# Altium PCB JUNORPCFrontv3.PcbDoc (part 2 of 2)
Units mil, origin at the board's own origin, x right, y up, seen from the top; angles counter-clockwise.
Board outline 3967.04 x 3967.04 mil, 8 copper layers (Top Layer, Internal Plane 1, Signal Layer 1, Internal Plane 2, Signal Layer 2, Internal Plane 3, Internal Plane 4, Bottom Layer), stack 66.304 mil thick; 289 components, 182 nets, 1049 pads, 357 vias.
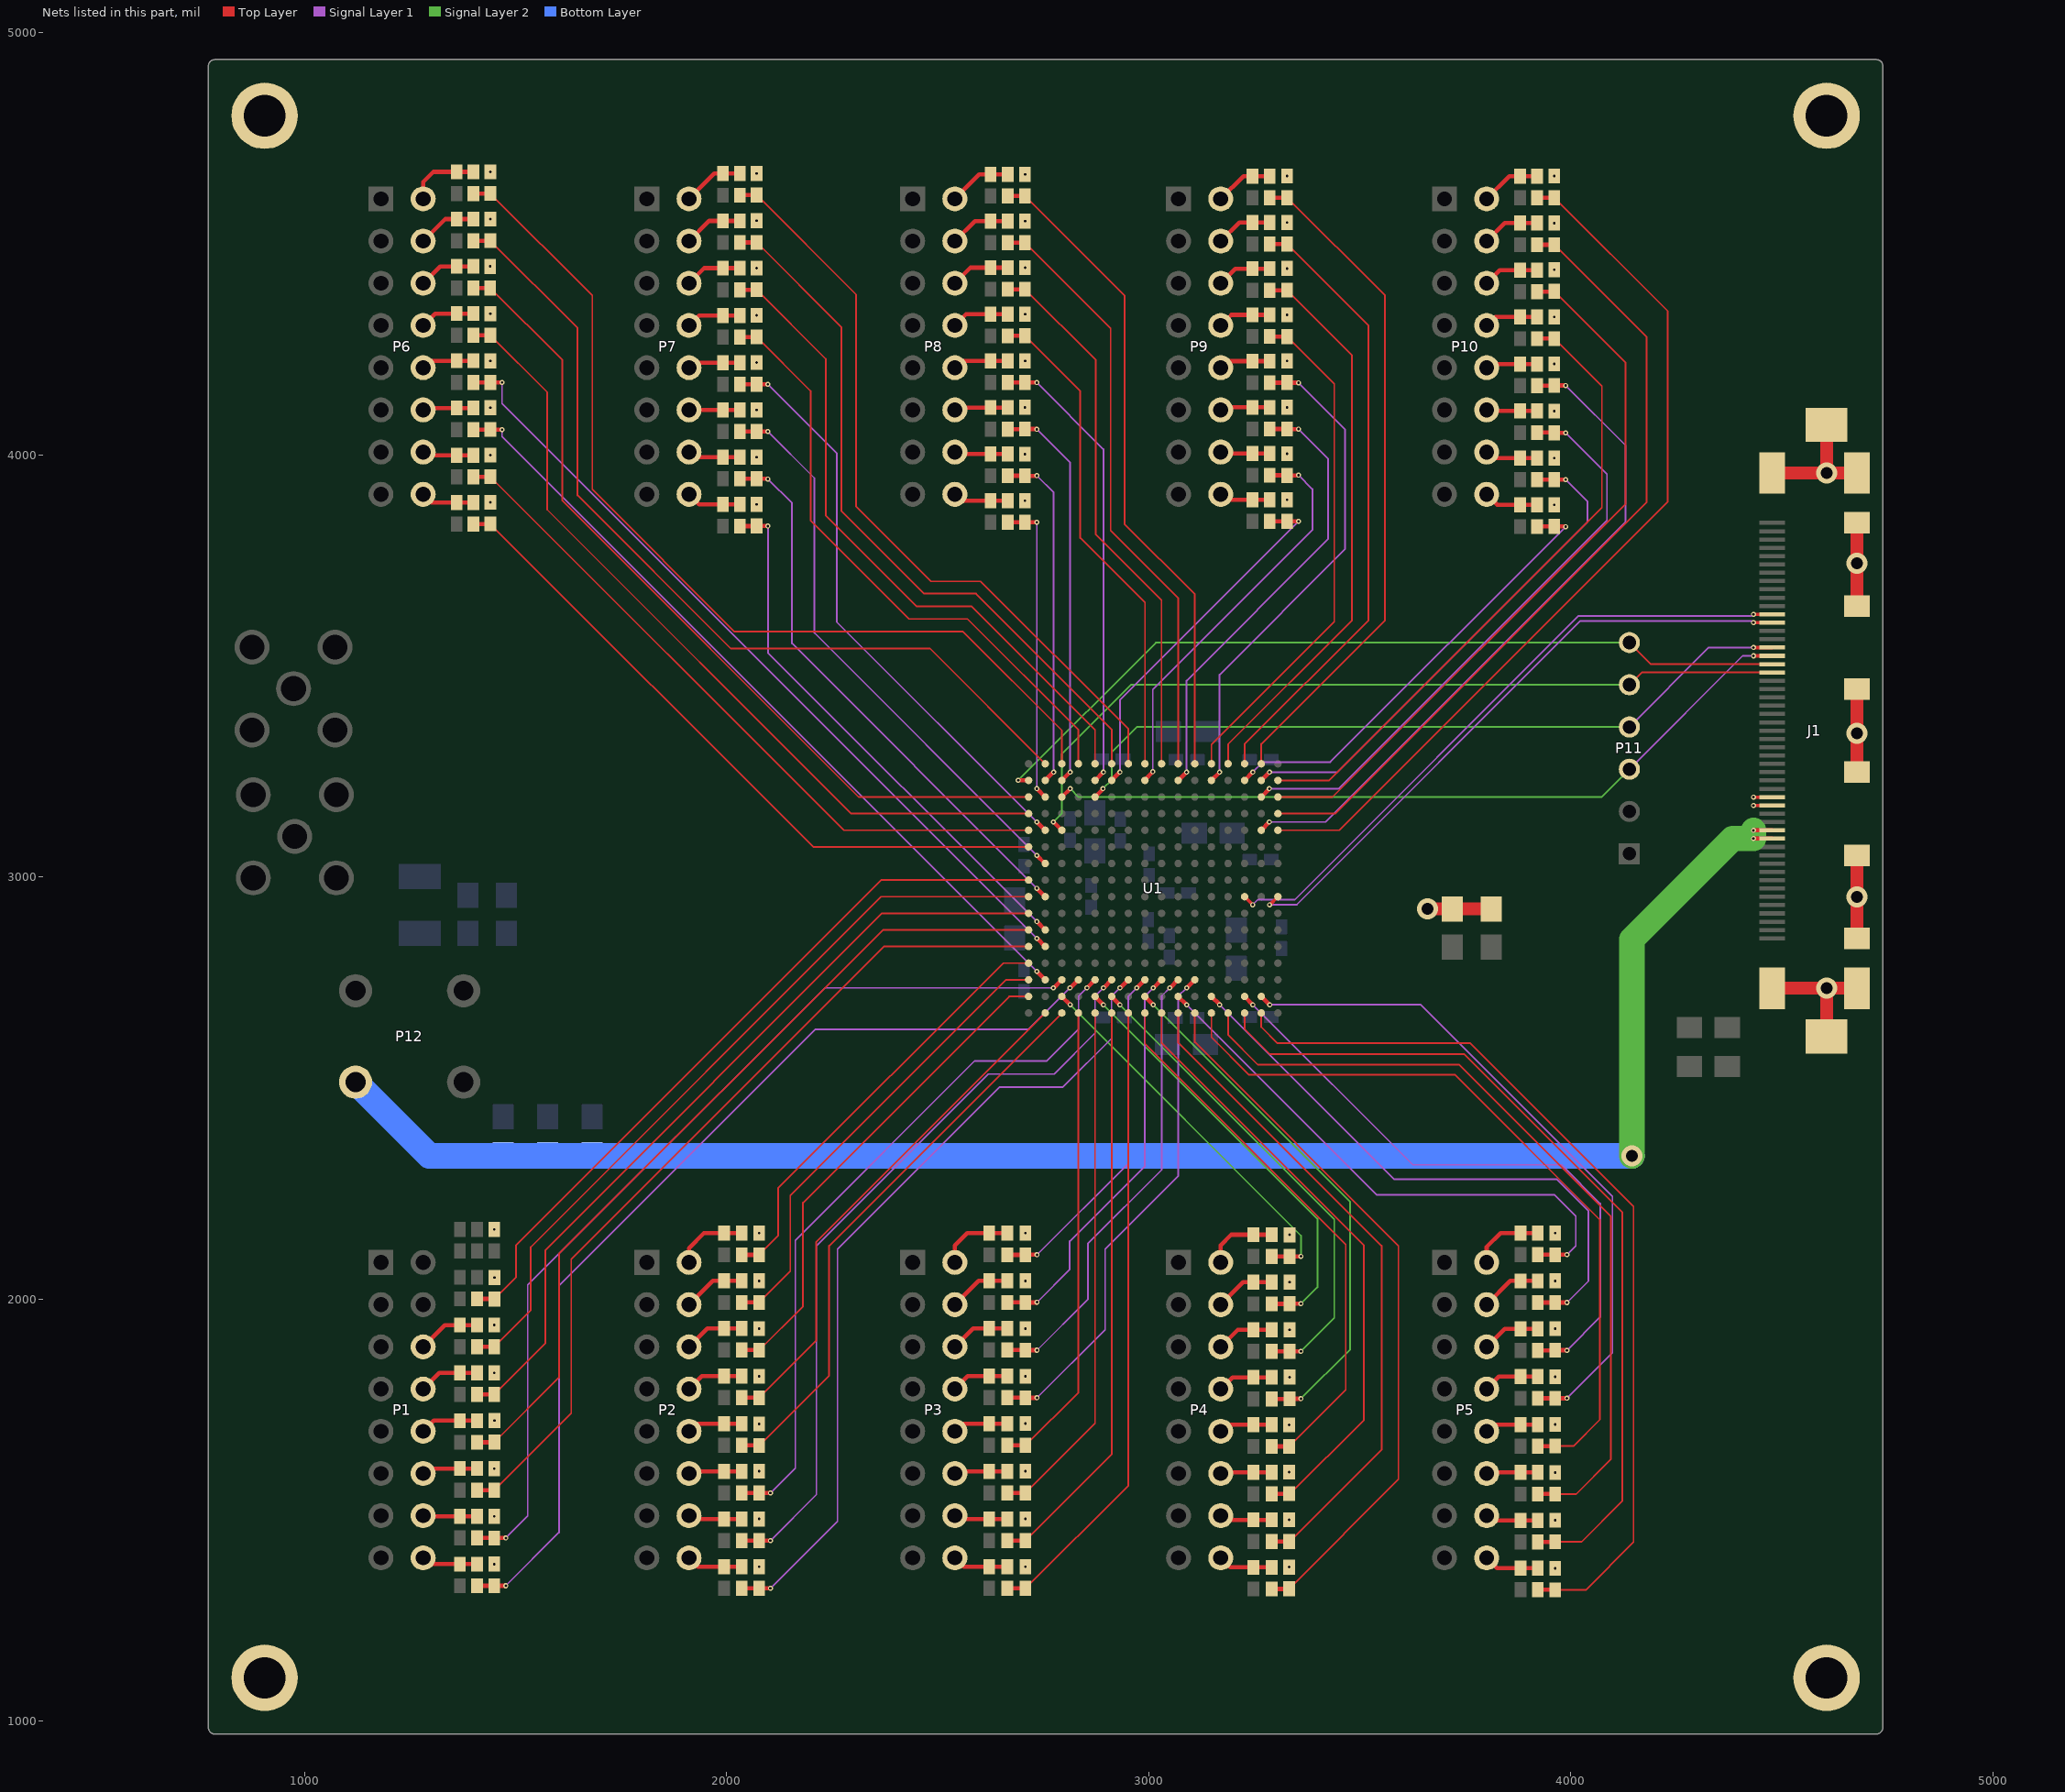
[diagram p8: the nets of this part, all layers, seen from the top]

## Via types
v1: diameter 12, hole 6, Top Layer to Bottom Layer, 347 vias
v2: diameter 50, hole 28, Top Layer to Bottom Layer, 10 vias

## Nets (pads, with @x,y where several pads share a name; then routed paths per layer and width w, separated by ;. In a path a pad name is that pad's centre, name@x,y a point inside that pad or via, vN(x,y) a via of type N, cw(c..) or ccw(c..) an arc to the next point about the centre after c; other vN are vias at no path point) (continued)
P1S2_LVCMOS12: C3.2 R4.1 U1.A9 | length 1762.2
  Top Layer w4: R4.1@1450,1999.67 1501,2050.67 1501,2127 2366.37,2992.37 U1.A9@2715.67,2992.37
  Top Layer w10: C3.2@1408.93,2000.3 R4.1@1449.59,2000.3
P1S3_ECL: C5.1 P1.6 R15.2 | length 149.2
  Top Layer w10: P1.6@1281.1,1886.61 1332.69,1938.2 R15.2@1368.26,1938.2 C5.1@1408.93,1938.2
P1S3_LVCMOS12: C5.2 R7.1 U1.A8 | length 1835.9
  Top Layer w4: R7.1@1449.59,1887.02 1536,1973.43 1536,2123 2366,2953 U1.A8@2715.67,2953
  Top Layer w10: C5.2@1408.93,1887.02 R7.1@1449.59,1887.02
P1S4_ECL: C7.1 P1.8 R21.2 | length 143.7
  Top Layer w10: P1.8@1281.1,1786.61 1319.4,1824.91 R21.2@1368.26,1824.91 C7.1@1408.93,1824.91
P1S4_LVCMOS12: C7.2 R10.1 U1.A7 | length 1908.3
  Top Layer w4: R10.1@1449.59,1773.67 1571,1895.14 1571,2116 2368.63,2913.63 U1.A7@2715.67,2913.63
  Top Layer w10: C7.2@1408.93,1773.73 R10.1@1449.59,1773.67
P1S5_ECL: C9.1 P1.10 R27.2 | length 138.2
  Top Layer w10: P1.10@1281.1,1686.61 1306.12,1711.63 R27.2@1368.26,1711.63 C9.1@1408.93,1711.63
P1S5_LVCMOS12: C9.2 R13.1 U1.A6 | length 1981.1
  Top Layer w4: R13.1@1449.59,1660.45 1603,1813.85 1603,2106.74 2370.52,2874.26 U1.A6@2715.67,2874.26
  Top Layer w10: C9.2@1408.93,1660.45 R13.1@1449.59,1660.45
P1S6_ECL: C11.1 P1.12 R33.2 | length 133.8
  Top Layer w10: P1.12@1281.1,1586.61 1292.83,1598.34 R33.2@1368.26,1598.34 C11.1@1408.93,1598.34 C11.1@1408.14,1599.13
P1S6_LVCMOS12: C11.2 R16.1 U1.A5 | length 2054.1
  Top Layer w4: R16.1@1449.59,1546.67 1632,1729.08 1632,2094 2372.89,2834.89 U1.A5@2715.67,2834.89
  Top Layer w10: C11.2@1408.93,1547.16 R16.1@1449.59,1547.16
P1S7_ECL: C13.1 P1.14 R39.2 | length 128.5
  Top Layer w10: P1.14@1281.1,1486.61 1282.66,1485.06 R39.2@1368.26,1485.06 C13.1@1408.93,1485.06
P1S7_LVCMOS12: C13.2 R19.1 U1.C3 | length 2253.9
  Top Layer w10: C13.2@1408.93,1433.88 R19.1@1449.59,1433.88 ; R19.1@1449.59,1433.67 v1(1477,1433.67) ; v1(2774.45,2737) 2775.26,2737 U1.C3@2794.41,2756.15
  Signal Layer 1 w4: v1(1477,1433.67) 1529,1485.67 1529,2033 2233,2737 v1(2774.45,2737)
P1S8_ECL: C15.1 P1.16 R45.2 | length 134
  Top Layer w10: P1.16@1281.1,1386.61 1295.94,1371.77 R45.2@1368.26,1371.77 C15.1@1408.93,1371.77
P1S8_LVCMOS12: C15.2 R22.1 U1.D3 | length 2361.9
  Top Layer w10: C15.2@1408.93,1320.59 R22.1@1449.59,1320.59 ; R22.1@1449.59,1320.67 1449.67,1320.59 v1(1477,1320.59) ; v1(2813.82,2737) 2814.63,2737 U1.D3@2833.78,2756.15
  Signal Layer 1 w4: v1(1477,1320.59) 1603,1446.59 1603,2031 2211,2639 2715.82,2639 v1(2813.82,2737)
P2S1_ECL: C2.1 P2.2 R5.2 | length 173
  Top Layer w10: P2.2@1911.02,2086.61 1911.02,2120.35 1946.44,2155.77 R5.2@1994.26,2155.77 C2.1@2035.59,2155.77
P2S1_LVCMOS12: C2.2 R2.1 U1.A4 | length 1032
  Top Layer w4: R2.1@2077,2104.67 2122,2149.67 2122,2262 2655.52,2795.52 U1.A4@2715.67,2795.52
  Top Layer w10: C2.2@2035.59,2104.59 R2.1@2076.93,2104.59
P2S2_ECL: C4.1 P2.4 R11.2 | length 147.9
  Top Layer w10: P2.4@1911.02,1986.61 1967.32,2042.91 R11.2@1994.26,2042.91 C4.1@2035.59,2042.91
P2S2_LVCMOS12: C4.2 R6.1 U1.A3 | length 1101.7
  Top Layer w4: R6.1@2076.93,1991.73 2151,2065.81 2151,2245 2662.15,2756.15 U1.A3@2715.67,2756.15
  Top Layer w10: C4.2@2035.59,1991.73 R6.1@2076.93,1991.73
P2S3_ECL: C6.1 P2.6 R17.2 | length 142.6
  Top Layer w10: P2.6@1911.02,1886.61 1954.47,1930.06 R17.2@1994.26,1930.06 C6.1@2035.59,1930.06
P2S3_LVCMOS12: C6.2 R8.1 U1.A2 | length 1170.9
  Top Layer w4: R8.1@2076.93,1878.67 2181,1982.74 2181,2228 2669.78,2716.78 U1.A2@2715.67,2716.78
  Top Layer w10: C6.2@2035.59,1878.88 R8.1@2076.93,1878.88
P2S4_ECL: C8.1 P2.8 R23.2 | length 137.2
  Top Layer w10: P2.8@1911.02,1786.61 1941.61,1817.2 R23.2@1994.26,1817.2 C8.1@2035.59,1817.2
P2S4_LVCMOS12: C8.2 R12.1 U1.B1 | length 1233.6
  Top Layer w4: R12.1@2076.93,1766.02 2212,1901.09 2212,2134.37 U1.B1@2755.04,2677.41
  Top Layer w10: C8.2@2035.59,1766.02 R12.1@2076.93,1766.02
P2S5_ECL: C10.1 P2.10 R29.2 | length 131.9
  Top Layer w10: P2.10@1911.02,1686.61 1928.75,1704.34 R29.2@1994.26,1704.34 C10.1@2035.59,1704.34
P2S5_LVCMOS12: C10.2 R14.1 U1.C1 | length 1363.2
  Top Layer w4: R14.1@2077,1652.67 2243,1818.67 2243,2126 U1.C1@2794.41,2677.41
  Top Layer w10: C10.2@2035.59,1653.16 R14.1@2076.93,1653.16
P2S6_ECL: C12.1 P2.12 R35.2 | length 126.6
  Top Layer w10: P2.12@1911.02,1586.61 1915.9,1591.49 R35.2@1994.26,1591.49 C12.1@2035.59,1591.49
P2S6_LVCMOS12: C12.2 R18.1 U1.E3 | length 1703.2
  Top Layer w10: C12.2@2035.59,1540.3 R18.1@2076.93,1540.3 ; R18.1@2076.93,1540.67 2103.64,1540.67 v1(2104,1540.3) ; v1(2854,2737) U1.E3@2873.15,2756.15
  Signal Layer 1 w4: v1(2104,1540.3) 2163,1599.3 2163,2139 2588,2564 2759,2564 2834,2639 2834,2717 v1(2854,2737)
P2S7_ECL: C14.1 P2.14 R41.2 | length 127.9
  Top Layer w10: P2.14@1911.02,1486.61 1919.01,1478.63 R41.2@1994.26,1478.63 C14.1@2035.59,1478.63
P2S7_LVCMOS12: C14.2 R20.1 U1.F3 | length 1823.3
  Top Layer w10: C14.2@2035.59,1427.45 R20.1@2076.93,1427.45 ; R20.1@2077,1427.67 v1(2104,1427.67) ; v1(2893,2737) 2893.37,2737 U1.F3@2912.52,2756.15
  Signal Layer 1 w4: v1(2104,1427.67) 2213,1536.67 2213,2126 2620,2533 2776,2533 2873,2630 2873,2717 v1(2893,2737)
P2S8_ECL: C16.1 P2.16 R47.2 | length 133.2
  Top Layer w10: P2.16@1911.02,1386.61 1931.87,1365.77 R47.2@1994.26,1365.77 C16.1@2035.59,1365.77
P2S8_LVCMOS12: C16.2 R24.1 U1.G3 | length 1949.5
  Top Layer w10: C16.2@2035.59,1314.59 R24.1@2076.93,1314.59 ; R24.1@2076.93,1314.67 2103.92,1314.67 v1(2104,1314.59) ; v1(2932,2737) 2932.74,2737 U1.G3@2951.89,2756.15
  Signal Layer 1 w4: v1(2104,1314.59) 2263,1473.59 2263,2118 2647,2502 2797,2502 2912,2617 2912,2717 v1(2932,2737)
P3S1_ECL: C17.1 P3.2 R51.2 | length 176.3
  Top Layer w10: P3.2@2540.94,2086.61 2540.94,2126.46 2570.26,2155.77 R51.2@2622.26,2155.77 C17.1@2665.26,2155.77
P3S1_LVCMOS12: C17.2 R25.1 U1.H3 | length 828.2
  Top Layer w10: C17.2@2665.26,2104.59 R25.1@2708.26,2104.59 ; R25.1@2708,2104.67 2735.59,2104.67 v1(2735.67,2104.59) ; v1(2972,2737) 2972.11,2737 U1.H3@2991.26,2756.15
  Signal Layer 1 w4: v1(2735.67,2104.59) 2952,2320.92 2952,2717 v1(2972,2737)
P3S2_ECL: C19.1 P3.4 R57.2 | length 147.6
  Top Layer w10: P3.4@2540.95,1986.61 2597.25,2042.91 R57.2@2622.26,2042.91 C19.1@2665.26,2042.91
P3S2_LVCMOS12: C19.2 R28.1 U1.J3 | length 957.1
  Top Layer w10: C19.2@2665.26,1991.73 R28.1@2708.26,1991.73 ; R28.1@2708,1991.67 2734.75,1991.67 v1(2735.67,1992.59) ; v1(3011,2737) 3011.48,2737 U1.J3@3030.63,2756.15
  Signal Layer 1 w4: v1(2735.67,1992.59) 2813,2069.92 2813,2137 2991,2315 2991,2717 v1(3011,2737)
P3S3_ECL: C21.1 P3.6 R63.2 | length 142.3
  Top Layer w10: P3.6@2540.94,1886.61 2584.39,1930.06 R63.2@2622.26,1930.06 C21.1@2665.26,1930.06
P3S3_LVCMOS12: C21.2 R31.1 U1.K3 | length 1087.1
  Top Layer w10: C21.2@2665.26,1878.88 R31.1@2708.26,1878.88 ; R31.1@2708,1878.67 v1(2735.67,1878.67) ; v1(3050,2737) 3050.85,2737 U1.K3@3070,2756.15
  Signal Layer 1 w4: v1(2735.67,1878.67) 2856,1999 2856,2131 3031,2306 3031,2718 v1(3050,2737)
P3S4_ECL: C23.1 P3.8 R69.2 | length 137
  Top Layer w10: P3.8@2540.94,1786.61 2571.53,1817.2 R69.2@2622.26,1817.2 C23.1@2665.26,1817.2
P3S4_LVCMOS12: C23.2 R34.1 U1.L3 | length 1215.9
  Top Layer w10: C23.2@2665.26,1766.02 R34.1@2708.26,1766.02 ; R34.1@2708,1765.67 2735.32,1765.67 v1(2735.67,1766.02) ; v1(3090,2737) 3090.22,2737 U1.L3@3109.37,2756.15
  Signal Layer 1 w4: v1(2735.67,1766.02) 2897,1927.35 2897,2118 3070,2291 3070,2717 v1(3090,2737)
P3S5_ECL: C25.1 P3.10 R75.2 | length 131.7
  Top Layer w10: P3.10@2540.95,1686.61 2558.67,1704.34 R75.2@2622.26,1704.34 C25.1@2665.26,1704.34
P3S5_LVCMOS12: C25.2 R37.1 U1.D1 | length 1119.2
  Top Layer w4: R37.1@2708.26,1653.16 2833.78,1778.68 U1.D1@2833.78,2677.41
  Top Layer w10: C25.2@2665.26,1653.16 R37.1@2708.26,1653.16
P3S6_ECL: C27.1 P3.12 R81.2 | length 126.3
  Top Layer w10: P3.12@2540.95,1586.61 2545.82,1591.49 R81.2@2622.26,1591.49 C27.1@2665.26,1591.49
P3S6_LVCMOS12: C27.2 R40.1 U1.E1 | length 1248.4
  Top Layer w4: R40.1@2708.26,1540.3 2873.15,1705.19 U1.E1@2873.15,2677.41
  Top Layer w10: C27.2@2665.26,1540.3 R40.1@2708.26,1540.3
P3S7_ECL: C29.1 P3.14 R87.2 | length 127.6
  Top Layer w10: P3.14@2540.94,1486.61 2548.93,1478.63 R87.2@2622.26,1478.63 C29.1@2665.26,1478.63
P3S7_LVCMOS12: C29.2 R43.1 U1.F1 | length 1377.6
  Top Layer w4: R43.1@2708.26,1427.45 2912.52,1631.71 U1.F1@2912.52,2677.41
  Top Layer w10: C29.2@2665.26,1427.45 R43.1@2708.26,1427.45
P3S8_ECL: C31.1 P3.16 R93.2 | length 132.9
  Top Layer w10: P3.16@2540.94,1386.61 2561.79,1365.77 R93.2@2622.26,1365.77 C31.1@2665.26,1365.77
P3S8_LVCMOS12: C31.2 R46.1 U1.G1 | length 1506.7
  Top Layer w4: R46.1@2708.26,1314.59 2951.89,1558.22 U1.G1@2951.89,2677.41
  Top Layer w10: C31.2@2665.26,1314.59 R46.1@2708.26,1314.59
P4S1_ECL: C18.1 P4.2 R53.2 | length 171.7
  Top Layer w10: P4.2@3170.87,2086.61 3170.87,2127.2 3195.85,2152.18 R53.2@3248.26,2152.18 C18.1@3291.59,2152.18
P4S1_LVCMOS12: C18.2 R26.1 U1.C2 | length 920.9
  Top Layer w10: U1.C2@2794.41,2716.74 v1(2814,2697.15) ; C18.2@3291.59,2101 R26.1@3334.93,2101 ; R26.1@3334,2100.87 3360.87,2100.87 v1(3361,2101)
  Signal Layer 2 w4: v1(2814,2697.15) 3361,2150.15 v1(3361,2101)
P4S2_ECL: C20.1 P4.4 R59.2 | length 142.7
  Top Layer w10: P4.4@3170.87,1986.61 3223.86,2039.61 R59.2@3248.26,2039.61 C20.1@3291.59,2039.61
P4S2_LVCMOS12: C20.2 R30.1 U1.E2 | length 1032.9
  Top Layer w10: U1.E2@2873.15,2716.78 2873.22,2716.78 v1(2893,2697) ; C20.2@3291.59,1988.43 R30.1@3334.93,1988.43 ; R30.1@3334,1988.67 v1(3361,1988.67)
  Signal Layer 2 w4: v1(2893,2697) 3400,2190 3400,2027.67 v1(3361,1988.67)
P4S3_ECL: C22.1 P4.6 R65.2 | length 137.5
  Top Layer w10: P4.6@3170.87,1886.61 3211.29,1927.04 R65.2@3248.26,1927.04 C22.1@3291.59,1927.04
P4S3_LVCMOS12: C22.2 R32.1 U1.F2 | length 1162.5
  Top Layer w10: U1.F2@2912.52,2716.78 2912.52,2716.48 v1(2932,2697) ; C22.2@3291.59,1875.86 R32.1@3334.93,1875.86 ; R32.1@3334,1875.67 3360.81,1875.67 v1(3361,1875.86)
  Signal Layer 2 w4: v1(2932,2697) 3440,2189 3440,1954.86 v1(3361,1875.86)
P4S4_ECL: C24.1 P4.8 R71.2 | length 132.3
  Top Layer w10: P4.8@3170.87,1786.61 3198.72,1814.47 R71.2@3248.26,1814.47 C24.1@3291.59,1814.47
P4S4_LVCMOS12: C24.2 R36.1 U1.H2 | length 1272.7
  Top Layer w10: U1.H2@2991.26,2716.74 v1(3011,2697) ; C24.2@3291.59,1763.29 R36.1@3334.93,1763.29 ; R36.1@3334,1763.67 v1(3361,1763.67)
  Signal Layer 2 w4: v1(3011,2697) 3477,2231 3477,1879.67 v1(3361,1763.67)
P4S5_ECL: C26.1 P4.10 R77.2 | length 127.1
  Top Layer w10: P4.10@3170.87,1686.61 3186.15,1701.9 R77.2@3248.26,1701.9 C26.1@3291.59,1701.9
P4S5_LVCMOS12: C26.2 R38.1 U1.H1 | length 1320.8
  Top Layer w4: U1.H1@2991.26,2677.41 2991.26,2604.74 3467,2129 3467,1784.67 R38.1@3333,1650.67 R38.1@3333,1650.67
  Top Layer w10: C26.2@3291.59,1650.71 R38.1@3333,1650.67
P4S6_ECL: C28.1 P4.12 R83.2 | length 121.8
  Top Layer w10: P4.12@3170.87,1586.61 3173.58,1589.32 R83.2@3248.26,1589.32 C28.1@3291.59,1589.32
P4S6_LVCMOS12: C28.2 R42.1 U1.J1 | length 1453.7
  Top Layer w4: U1.J1@3030.63,2677.41 3030.63,2606.37 3510,2127 3510,1713.22 R42.1@3334.93,1538.14
  Top Layer w10: C28.2@3291.59,1538.14 R42.1@3334.93,1538.14
P4S7_ECL: C30.1 P4.14 R89.2 | length 124.8
  Top Layer w10: P4.14@3170.87,1486.61 3180.73,1476.75 R89.2@3248.26,1476.75 C30.1@3291.59,1476.75
P4S7_LVCMOS12: C30.2 R44.1 U1.K1 | length 1584.7
  Top Layer w4: U1.K1@3070,2677.41 3070,2608 3552,2126 3552,1642.65 R44.1@3334.93,1425.57
  Top Layer w10: C30.2@3291.59,1425.57 R44.1@3334.93,1425.57
P4S8_ECL: C32.1 P4.16 R95.2 | length 130
  Top Layer w10: P4.16@3170.87,1386.61 3193.3,1364.18 R95.2@3248.26,1364.18 C32.1@3291.59,1364.18
P4S8_LVCMOS12: C32.2 R48.1 U1.L1 | length 1714.3
  Top Layer w4: U1.L1@3109.37,2677.41 3109.37,2608.63 3592,2126 3592,1572.67 R48.1@3333,1313.67
  Top Layer w10: C32.2@3291.59,1313 R48.1@3334.93,1313
P5S1_ECL: C33.1 P5.2 R99.2 | length 171.7
  Top Layer w10: P5.2@3800.79,2086.61 3800.79,2123.12 3833.85,2156.18 C33.1@3922.26,2156.18
P5S1_LVCMOS12: C33.2 R49.1 U1.K2 | length 1326.3
  Top Layer w10: U1.K2@3070,2716.78 3089.78,2697 v1(3090,2697) ; C33.2@3922.26,2105 R49.1@3963.26,2105 ; R49.1@3963.26,2104.67 3990.67,2104.67 v1(3991,2105)
  Signal Layer 1 w4: v1(3090,2697) 3540,2247 3961,2247 4012,2196 4012,2126 v1(3991,2105)
P5S2_ECL: C35.1 P5.4 R105.2 | length 144.7
  Top Layer w10: P5.4@3800.79,1986.61 3856.93,2042.75 R105.2@3881.26,2042.75 C35.1@3922.26,2042.75
P5S2_LVCMOS12: C35.2 R52.1 U1.M2 | length 1410.6
  Top Layer w10: U1.M2@3148.74,2716.78 3168,2697.52 v1(3168,2697) ; C35.2@3922.26,1991.57 R52.1@3963.26,1991.57 ; R52.1@3963.26,1991.67 3990.9,1991.67 v1(3991,1991.57)
  Signal Layer 1 w4: v1(3168,2697) 3581,2284 3966,2284 4042,2208 4042,2042.57 v1(3991,1991.57)
P5S3_ECL: C37.1 P5.6 R111.2 | length 139.2
  Top Layer w10: P5.6@3800.79,1886.61 3843.5,1929.32 R111.2@3881.26,1929.32 C37.1@3922.26,1929.32
P5S3_LVCMOS12: C37.2 R55.1 U1.P2 | length 1495.5
  Top Layer w10: U1.P2@3227.48,2716.78 3227.48,2716.52 v1(3247,2697) ; C37.2@3922.26,1878.14 R55.1@3963.26,1878.14 ; R55.1@3963.26,1878.67 3990.47,1878.67 v1(3991,1878.14)
  Signal Layer 1 w4: v1(3247,2697) 3626,2318 3978,2318 4070,2226 4070,1957.14 v1(3991,1878.14)
P5S4_ECL: C39.1 P5.8 R117.2 | length 133.6
  Top Layer w10: P5.8@3800.79,1786.61 3830.07,1815.9 R117.2@3881.26,1815.9 C39.1@3922.26,1815.9
P5S4_LVCMOS12: C39.2 R58.1 U1.R2 | length 1620.4
  Top Layer w10: U1.R2@3266.85,2716.78 3286.63,2697 v1(3287,2697) ; C39.2@3922.26,1764.71 R58.1@3963.26,1764.71 ; R58.1@3963,1764.67 v1(3991,1764.71) v1(3991,1764.71)
  Signal Layer 1 w4: v1(3287,2697) 3645,2697 4099,2243 4099,1872.71 v1(3991,1764.71)
P5S5_ECL: C41.1 P5.10 R123.2 | length 128
  Top Layer w10: P5.10@3800.79,1686.61 3816.64,1702.47 R123.2@3881.26,1702.47 C41.1@3922.26,1702.47
P5S5_LVCMOS12: C41.2 R61.1 U1.M1 | length 1803.3
  Top Layer w4: U1.M1@3148.74,2677.41 3148.74,2620.26 3238,2531 3726,2531 4069,2188 4069,1714 4006.67,1651.67 R61.1@3963,1651.67
  Top Layer w10: C41.2@3922.26,1651.29 R61.1@3963.26,1651.29
P5S6_ECL: C43.1 P5.12 R129.2 | length 122.5
  Top Layer w10: P5.12@3800.79,1586.61 3803.21,1589.04 R129.2@3881.26,1589.04 C43.1@3922.26,1589.04
P5S6_LVCMOS12: C43.2 R64.1 U1.N1 | length 1919.6
  Top Layer w4: U1.N1@3188.11,2677.41 3188.11,2625.89 3259,2555 3736,2555 4095,2196 4095,1620 4012.67,1537.67 R64.1@3963,1537.67
  Top Layer w10: C43.2@3922.26,1537.86 R64.1@3963.26,1537.86
P5S7_ECL: C45.1 P5.14 R135.2 | length 126
  Top Layer w10: P5.14@3800.79,1486.61 3811.79,1475.61 R135.2@3881.26,1475.61 C45.1@3922.26,1475.61
P5S7_LVCMOS12: C45.2 R67.1 U1.P1 | length 2036.7
  Top Layer w4: U1.P1@3227.48,2677.41 3227.48,2639.78 3287.26,2580 3748,2580 4122,2206 4122,1521 4025.67,1424.67 R67.1@3963,1424.67
  Top Layer w10: C45.2@3922.26,1424.43 R67.1@3963.26,1424.43
P5S8_ECL: C47.1 P5.16 R141.2 | length 131.6
  Top Layer w10: P5.16@3800.79,1386.61 3825.22,1362.18 R141.2@3881.26,1362.18 C47.1@3922.26,1362.18
P5S8_LVCMOS12: C47.2 R70.1 U1.R1 | length 2160.5
  Top Layer w4: U1.R1@3266.85,2677.41 3266.85,2644.15 3305,2606 3762,2606 4149,2219 4149,1424 4035.67,1310.67 R70.1@3963,1310.67
  Top Layer w10: C47.2@3922.26,1311 R70.1@3963.26,1311
P6S1_ECL: C34.1 P6.2 R101.2 | length 169.1
  Top Layer w10: P6.2@1281.1,4606.3 1281.1,4646.39 1304.85,4670.14 R101.2@1360.26,4670.14 C34.1@1400.26,4670.14
P6S1_LVCMOS12: C34.2 R50.1 U1.C16 | length 2268.8
  Top Layer w4: R50.1@1440.26,4618.96 1682,4377.22 1682,3918 2019,3581 2560,3581 2794.41,3346.59 U1.C16@2794.41,3267.96
  Top Layer w10: C34.2@1400.26,4618.96 R50.1@1440.26,4618.96
P6S2_ECL: C36.1 P6.4 R107.2 | length 140.7
  Top Layer w10: P6.4@1281.1,4506.3 1333.09,4558.28 R107.2@1360.26,4558.28 C36.1@1400.26,4558.28
P6S2_LVCMOS12: C36.2 R54.1 U1.B16 | length 2100.3
  Top Layer w4: R54.1@1440.26,4507.15 1647,4300.41 1647,3904 2010,3541 2482,3541 U1.B16@2755.04,3267.96
  Top Layer w10: C36.2@1400.26,4507.1 R54.1@1440.26,4507.15
P6S3_ECL: C38.1 P6.6 R113.2 | length 135.8
  Top Layer w10: P6.6@1281.1,4406.3 1321.23,4446.43 R113.2@1360.26,4446.43 C38.1@1400.26,4446.43
P6S3_LVCMOS12: C38.2 R56.1 U1.A14 | length 2010.3
  Top Layer w4: R56.1@1440,4395.15 1611,4224.15 1611,3891 2312.78,3189.22 U1.A14@2715.67,3189.22
  Top Layer w10: C38.2@1400.26,4395.25 R56.1@1440.26,4395.25
P6S4_ECL: C40.1 P6.8 R119.2 | length 130.9
  Top Layer w10: P6.8@1281.1,4306.3 1309.37,4334.57 R119.2@1360.26,4334.57 C40.1@1400.26,4334.57
P6S4_LVCMOS12: C40.2 R60.1 U1.A13 | length 1947.9
  Top Layer w4: R60.1@1440.26,4283.15 1575,4148.41 1575,3870 2295.15,3149.85 U1.A13@2715.67,3149.85
  Top Layer w10: C40.2@1400.26,4283.39 R60.1@1440.26,4283.39
P6S5_ECL: C42.1 P6.10 R125.2 | length 126
  Top Layer w10: P6.10@1281.1,4206.3 1297.52,4222.71 R125.2@1360.26,4222.71 C42.1@1400.26,4222.71
P6S5_LVCMOS12: C42.2 R62.1 U1.B5 | length 1938.2
  Top Layer w10: C42.2@1400.26,4171.53 R62.1@1440.26,4171.53 ; R62.1@1440.26,4171.15 1467.62,4171.15 v1(1468,4171.53) ; v1(2735,2854) 2735.93,2854 U1.B5@2755.04,2834.89
  Signal Layer 1 w4: v1(1468,4171.53) 1468,4121 v1(2735,2854)
P6S6_ECL: C44.1 P6.12 R131.2 | length 121
  Top Layer w10: P6.12@1281.1,4106.3 1285.66,4110.86 R131.2@1360.26,4110.86 C44.1@1400.26,4110.86
P6S6_LVCMOS12: C44.2 R66.1 U1.B3 | length 1904.7
  Top Layer w10: C44.2@1400.26,4059.67 R66.1@1440.26,4059.67 ; R66.1@1440.26,4060.15 1440.73,4059.67 v1(1468,4059.67) ; v1(2735,2776) 2735.19,2776 U1.B3@2755.04,2756.15
  Signal Layer 1 w4: v1(1468,4059.67) 1468,4043 v1(2735,2776)
P6S7_ECL: C46.1 P6.14 R137.2 | length 122.2
  Top Layer w10: P6.14@1281.1,4006.3 1288.4,3999 R137.2@1360.26,3999 C46.1@1400.26,3999
P6S7_LVCMOS12: C46.2 R68.1 U1.A12 | length 1662.4
  Top Layer w4: R68.1@1440.26,3948.15 2277.93,3110.48 U1.A12@2715.67,3110.48
  Top Layer w10: C46.2@1400.26,3947.82 R68.1@1440.26,3947.82
P6S8_ECL: C48.1 P6.16 R143.2 | length 127.1
  Top Layer w10: P6.16@1281.1,3906.3 1300.26,3887.14 R143.2@1360.26,3887.14 C48.1@1400.26,3887.14
P6S8_LVCMOS12: C48.2 R72.1 U1.A11 | length 1632.3
  Top Layer w4: R72.1@1440.26,3836.15 2205.3,3071.11 U1.A11@2715.67,3071.11
  Top Layer w10: C48.2@1400.26,3835.96 R72.1@1440.26,3835.96
P7S1_ECL: C49.1 P7.2 R147.2 | length 145
  Top Layer w10: P7.2@1911.02,4606.3 1970.87,4666.14 R147.2@1991.26,4666.14 C49.1@2031.26,4666.14
P7S1_LVCMOS12: C49.2 R73.1 U1.G16 | length 1820.9
  Top Layer w4: R73.1@2071.26,4614.96 2307,4379.22 2307,3877 2484,3700 2602,3700 2951.89,3350.11 U1.G16@2951.89,3267.96
  Top Layer w10: C49.2@2031.26,4614.96 R73.1@2071.26,4614.96
P7S2_ECL: C51.1 P7.4 R153.2 | length 140.1
  Top Layer w10: P7.4@1911.02,4506.3 1958.87,4554.14 R153.2@1991.26,4554.14 C51.1@2031.26,4554.14
P7S2_LVCMOS12: C51.2 R76.1 U1.F16 | length 1695.5
  Top Layer w4: R76.1@2071.26,4502.96 2272,4302.22 2272,3867 2468,3671 2591,3671 2912.52,3349.48 U1.F16@2912.52,3267.96
  Top Layer w10: C51.2@2031.26,4502.96 R76.1@2071.26,4502.96
P7S3_ECL: C53.1 P7.6 R159.2 | length 135.1
  Top Layer w10: P7.6@1911.02,4406.3 1946.87,4442.14 R159.2@1991.26,4442.14 C53.1@2031.26,4442.14
P7S3_LVCMOS12: C53.2 R79.1 U1.E16 | length 1571.3
  Top Layer w4: R79.1@2071.26,4390.96 2235,4227.22 2235,3856 2450,3641 2580,3641 2873.15,3347.85 U1.E16@2873.15,3267.96
  Top Layer w10: C53.2@2031.26,4390.96 R79.1@2071.26,4390.96
P7S4_ECL: C55.1 P7.8 R165.2 | length 130.1
  Top Layer w10: P7.8@1911.02,4306.3 1934.87,4330.14 R165.2@1991.26,4330.14 C55.1@2031.26,4330.14
P7S4_LVCMOS12: C55.2 R82.1 U1.D16 | length 1448.1
  Top Layer w4: R82.1@2071.26,4278.96 2199,4151.22 2199,3844 2432,3611 2570.71,3611 2833.78,3347.93 U1.D16@2833.78,3267.96
  Top Layer w10: C55.2@2031.26,4278.96 R82.1@2071.26,4278.96
P7S5_ECL: C57.1 P7.10 R171.2 | length 125.1
  Top Layer w10: P7.10@1911.02,4206.3 1922.87,4218.14 R171.2@1991.26,4218.14 C57.1@2031.26,4218.14
P7S5_LVCMOS12: C57.2 R85.1 U1.B12 | length 1396
  Top Layer w10: C57.2@2031.26,4166.96 R85.1@2071.26,4166.96 ; R85.1@2071,4167.15 2097.81,4167.15 v1(2098,4166.96) ; v1(2735,3130) 2735.52,3130 U1.B12@2755.04,3110.48
  Signal Layer 1 w4: v1(2098,4166.96) 2261,4003.96 2261,3604 v1(2735,3130)
P7S6_ECL: C59.1 P7.12 R177.2 | length 120.3
  Top Layer w10: P7.12@1911.02,4106.3 2031.1,4106.3 C59.1@2031.26,4106.14
P7S6_LVCMOS12: C59.2 R88.1 U1.B10 | length 1362.9
  Top Layer w10: C59.2@2031.26,4054.96 R88.1@2071.26,4054.96 ; R88.1@2071,4055.15 2097.81,4055.15 v1(2098,4054.96) ; v1(2735,3051) 2754.26,3031.74 U1.B10@2755.04,3031.74
  Signal Layer 1 w4: v1(2098,4054.96) 2208,3944.96 2208,3578 v1(2735,3051)
P7S7_ECL: C61.1 P7.14 R183.2 | length 125.3
  Top Layer w10: P7.14@1911.02,4006.3 1923.18,3994.14 R183.2@1991.26,3994.14 C61.1@2031.26,3994.14
P7S7_LVCMOS12: C61.2 R91.1 U1.B8 | length 1328.7
  Top Layer w10: C61.2@2031.26,3942.96 R91.1@2071.26,3942.96 ; R91.1@2071.26,3943.15 2097.4,3943.15 v1(2098,3942.55) ; v1(2735,2973) U1.B8@2755.04,2953
  Signal Layer 1 w4: v1(2098,3942.55) 2155,3885.55 2155,3553 v1(2735,2973)
P7S8_ECL: C63.1 P7.16 R189.2 | length 130.2
  Top Layer w10: P7.16@1911.02,3906.3 1935.18,3882.14 R189.2@1991.26,3882.14 C63.1@2031.26,3882.14
P7S8_LVCMOS12: C63.2 R94.1 U1.B6 | length 1295.8
  Top Layer w10: C63.2@2031.26,3830.96 R94.1@2071.26,3830.96 ; R94.1@2071.26,3831.15 2097.81,3831.15 v1(2098,3830.96) ; v1(2735,2894) 2735.3,2894 U1.B6@2755.04,2874.26
  Signal Layer 1 w4: v1(2098,3830.96) 2098,3531 v1(2735,2894)
P8S1_ECL: C50.1 P8.2 R149.2 | length 149.3
  Top Layer w10: P8.2@2540.94,4606.3 2598.79,4664.14 R149.2@2625.26,4664.14 C50.1@2666.26,4664.14
P8S1_LVCMOS12: C50.2 R74.1 U1.L16 | length 1552.6
  Top Layer w4: R74.1@2707.26,4612.96 2943,4377.22 2943,3836 3109.37,3669.63 U1.L16@3109.37,3267.96
  Top Layer w10: C50.2@2666.26,4612.96 R74.1@2707.26,4612.96
P8S2_ECL: C52.1 P8.4 R155.2 | length 145
  Top Layer w10: P8.4@2540.94,4506.3 2588.36,4553.71 R155.2@2625.26,4553.71 C52.1@2666.26,4553.71
P8S2_LVCMOS12: C52.2 R78.1 U1.K16 | length 1425.8
  Top Layer w4: R78.1@2707.26,4502.53 2910,4299.79 2910,3821 3070,3661 U1.K16@3070,3267.96
  Top Layer w10: C52.2@2666.26,4502.53 R78.1@2707.26,4502.53
P8S3_ECL: C54.1 P8.6 R161.2 | length 140.6
  Top Layer w10: P8.6@2540.94,4406.3 2577.93,4443.28 R161.2@2625.26,4443.28 C54.1@2666.26,4443.28
P8S3_LVCMOS12: C54.2 R80.1 U1.J16 | length 1299.1
  Top Layer w4: R80.1@2707.26,4392.15 2875,4224.36 2875,3811.26 3030.63,3655.63 U1.J16@3030.63,3267.96
  Top Layer w10: C54.2@2666.26,4392.1 R80.1@2707.26,4392.15
P8S4_ECL: C56.1 P8.8 R167.2 | length 136.3
  Top Layer w10: P8.8@2540.94,4306.3 2567.5,4332.86 R167.2@2625.26,4332.86 C56.1@2666.26,4332.86
P8S4_LVCMOS12: C56.2 R84.1 U1.H16 | length 1172.4
  Top Layer w4: R84.1@2707.26,4281.67 2838,4150.93 2838,3803 2991.26,3649.74 U1.H16@2991.26,3267.96
  Top Layer w10: C56.2@2666.26,4281.67 R84.1@2707.26,4281.67
P8S5_ECL: C58.1 P8.10 R173.2 | length 132
  Top Layer w10: P8.10@2540.94,4206.3 2557.07,4222.43 R173.2@2625.26,4222.43 C58.1@2666.26,4222.43
P8S5_LVCMOS12: C58.2 R86.1 U1.E15 | length 1085.1
  Top Layer w10: C58.2@2666.26,4171.25 R86.1@2707.26,4171.25 ; R86.1@2707.26,4171.15 2734.85,4171.15 v1(2735,4171) ; U1.E15@2873.15,3228.59 2873.59,3228.59 v1(2893,3248)
  Signal Layer 1 w4: v1(2735,4171) 2893,4013 v1(2893,3248)
P8S6_ECL: C60.1 P8.12 R179.2 | length 127.7
  Top Layer w10: P8.12@2540.94,4106.3 2546.64,4112 R179.2@2625.26,4112 C60.1@2666.26,4112
P8S6_LVCMOS12: C60.2 R90.1 U1.C15 | length 941.9
  Top Layer w10: C60.2@2666.26,4060.82 R90.1@2707.26,4060.82 ; R90.1@2707,4061.15 2734,4061.15 v1(2735,4060.15) ; U1.C15@2794.41,3228.59 2813.82,3248 v1(2814,3248)
  Signal Layer 1 w4: v1(2735,4060.15) 2814,3981.15 v1(2814,3248)
P8S7_ECL: C62.1 P8.14 R185.2 | length 127.3
  Top Layer w10: P8.14@2540.94,4006.3 2545.67,4001.57 R185.2@2625.26,4001.57 C62.1@2666.26,4001.57
P8S7_LVCMOS12: C62.2 R92.1 U1.B15 | length 816.1
  Top Layer w10: C62.2@2666.26,3950.39 R92.1@2707.26,3950.39 ; R92.1@2707,3950.15 2734.76,3950.15 v1(2735,3950.39) ; U1.B15@2755.04,3228.59 2774.45,3248 v1(2775,3248)
  Signal Layer 1 w4: v1(2735,3950.39) 2775,3910.39 v1(2775,3248)
P8S8_ECL: C64.1 P8.16 R191.2 | length 131.6
  Top Layer w10: P8.16@2540.94,3906.3 2556.1,3891.14 R191.2@2625.26,3891.14 C64.1@2666.26,3891.14
P8S8_LVCMOS12: C64.2 R96.1 U1.B14 | length 728.3
  Top Layer w10: C64.2@2666.26,3839.96 R96.1@2707.26,3839.96 ; R96.1@2707,3840.15 2734.81,3840.15 v1(2735,3839.96) ; v1(2735,3209) 2735.26,3209 U1.B14@2755.04,3189.22
  Signal Layer 1 w4: v1(2735,3209) v1(2735,3839.96)
P9S1_ECL: C65.1 P9.2 R195.2 | length 138.3
  Top Layer w10: P9.2@3170.87,4606.3 3224.71,4660.14 R195.2@3245.87,4660.14 C65.1@3286.87,4660.14
P9S1_LVCMOS12: C65.2 R97.1 U1.R16 | length 1599.7
  Top Layer w4: U1.R16@3266.85,3267.96 3266.85,3314.85 3560,3608 3560,4377.15 R97.1@3328,4609.15
  Top Layer w10: C65.2@3286.87,4608.96 R97.1@3327.87,4608.96
P9S2_ECL: C67.1 P9.4 R201.2 | length 134.3
  Top Layer w10: P9.4@3170.87,4506.3 3215.14,4550.57 R201.2@3245.87,4550.57 C67.1@3286.87,4550.57
P9S2_LVCMOS12: C67.2 R100.1 U1.P16 | length 1474
  Top Layer w4: U1.P16@3227.48,3267.96 3227.48,3314.48 3521,3608 3521,4306.26 R100.1@3327.87,4499.39
  Top Layer w10: C67.2@3286.87,4499.39 R100.1@3327.87,4499.39
P9S3_ECL: C69.1 P9.6 R207.2 | length 130.4
  Top Layer w10: P9.6@3170.87,4406.3 3205.57,4441 R207.2@3245.87,4441 C69.1@3286.87,4441
P9S3_LVCMOS12: C69.2 R103.1 U1.N16 | length 1348.4
  Top Layer w4: U1.N16@3188.11,3267.96 3188.11,3314.11 3482,3608 3482,4235.68 R103.1@3327.87,4389.82
  Top Layer w10: C69.2@3286.87,4389.82 R103.1@3327.87,4389.82
P9S4_ECL: C71.1 P9.8 R213.2 | length 126.4
  Top Layer w10: P9.8@3170.87,4306.3 3195.99,4331.43 R213.2@3245.87,4331.43 C71.1@3286.87,4331.43
P9S4_LVCMOS12: C71.2 R106.1 U1.M16 | length 1220.3
  Top Layer w4: U1.M16@3148.74,3267.96 3148.74,3313.74 3440,3605 3440,4168.02 R106.1@3327.87,4280.15
  Top Layer w10: C71.2@3286.87,4280.25 R106.1@3327.87,4280.25
P9S5_ECL: C73.1 P9.10 R219.2 | length 122.4
  Top Layer w10: P9.10@3170.87,4206.3 3186.42,4221.86 R219.2@3245.87,4221.86 C73.1@3286.87,4221.86
P9S5_LVCMOS12: C73.2 R109.1 U1.M15 | length 1187
  Top Layer w10: U1.M15@3148.74,3228.59 3168,3247.85 v1(3168,3248) ; C73.2@3286.87,4170.67 R109.1@3327.87,4170.67 ; R109.1@3327.87,4171.15 3328.34,4170.67 v1(3355,4170.67)
  Signal Layer 1 w4: v1(3168,3248) 3168,3479 3465,3776 3465,4060.67 v1(3355,4170.67)
P9S6_ECL: C75.1 P9.12 R225.2 | length 118.5
  Top Layer w10: P9.12@3170.87,4106.3 3176.85,4112.28 R225.2@3245.87,4112.28 C75.1@3286.87,4112.28
P9S6_LVCMOS12: C75.2 R112.1 U1.K15 | length 1076.6
  Top Layer w10: U1.K15@3070,3228.59 3070.37,3228.59 v1(3089.78,3248) ; C75.2@3286.87,4061.1 R112.1@3327.87,4061.1 ; R112.1@3328,4061.15 3328.33,4060.82 v1(3355,4060.82)
  Signal Layer 1 w4: v1(3089.78,3248) 3089.78,3464.78 3425,3800 3425,3990.82 v1(3355,4060.82)
P9S7_ECL: C77.1 P9.14 R231.2 | length 117.5
  Top Layer w10: P9.14@3170.87,4006.3 3174.45,4002.71 R231.2@3245.87,4002.71 C77.1@3286.87,4002.71
P9S7_LVCMOS12: C77.2 R115.1 U1.H15 | length 969.2
  Top Layer w10: U1.H15@2991.26,3228.59 2991.26,3230.26 v1(3010,3249) ; C77.2@3286.87,3951.53 R115.1@3327.87,3951.53 ; R115.1@3327.87,3951.15 3354.62,3951.15 v1(3355,3951.53)
  Signal Layer 1 w4: v1(3010,3249) 3010,3444 3388,3822 3388,3918.53 v1(3355,3951.53)
P9S8_ECL: C79.1 P9.16 R237.2 | length 121.5
  Top Layer w10: P9.16@3170.87,3906.3 3184.02,3893.14 R237.2@3245.87,3893.14 C79.1@3286.87,3893.14
P9S8_LVCMOS12: C79.2 R118.1 U1.F15 | length 864.9
  Top Layer w10: U1.F15@2912.52,3228.59 2931.93,3248 v1(2932,3248) ; C79.2@3286.87,3841.96 R118.1@3327.87,3841.96 ; R118.1@3328,3842.15 v1(3355,3842.15)
  Signal Layer 1 w4: v1(2932,3248) 2932,3419.15 v1(3355,3842.15)
P10S1_ECL: C66.1 P10.2 R197.2 | length 141.8
  Top Layer w10: P10.2@3800.79,4606.3 3854.63,4660.14 R197.2@3880.26,4660.14 C66.1@3920.26,4660.14
P10S1_LVCMOS12: C66.2 R98.1 U1.T12 | length 2117.8
  Top Layer w4: U1.T12@3306.22,3110.48 3451.48,3110.48 4230,3889 4230,4340.15 R98.1@3961,4609.15
  Top Layer w10: C66.2@3920.26,4608.96 R98.1@3960.26,4608.96
P10S2_ECL: C68.1 P10.4 R203.2 | length 137.1
  Top Layer w10: P10.4@3800.79,4506.3 3843.34,4548.86 R203.2@3880.26,4548.86 C68.1@3920.26,4548.86
P10S2_LVCMOS12: C68.2 R102.1 U1.T13 | length 1919.9
  Top Layer w4: U1.T13@3306.22,3149.85 3441.85,3149.85 4180,3888 4180,4278.68 R102.1@3961,4497.68
  Top Layer w10: C68.2@3920.26,4497.68 R102.1@3960.26,4497.68
P10S3_ECL: C70.1 P10.6 R209.2 | length 132.4
  Top Layer w10: P10.6@3800.79,4406.3 3832.06,4437.57 R209.2@3880.26,4437.57 C70.1@3920.26,4437.57
P10S3_LVCMOS12: C70.2 R104.1 U1.T14 | length 1724.7
  Top Layer w4: U1.T14@3306.22,3189.22 3435.22,3189.22 4130,3884 4130,4218.15 R104.1@3961,4387.15
  Top Layer w10: C70.2@3920.26,4386.39 R104.1@3960.26,4386.39
P10S4_ECL: C72.1 P10.8 R215.2 | length 127.8
  Top Layer w10: P10.8@3800.79,4306.3 3820.77,4326.28 R215.2@3880.26,4326.28 C72.1@3920.26,4326.28
P10S4_LVCMOS12: C72.2 R108.1 U1.T15 | length 1522.5
  Top Layer w4: U1.T15@3306.22,3228.59 3427.59,3228.59 4074,3875 4074,4162.15 R108.1@3961,4275.15
  Top Layer w10: C72.2@3920.26,4275.1 R108.1@3960.26,4275.1
P10S5_ECL: C74.1 P10.10 R221.2 | length 123.1
  Top Layer w10: P10.10@3800.79,4206.3 3809.49,4215 R221.2@3880.26,4215 C74.1@3920.26,4215
P10S5_LVCMOS12: C74.2 R110.1 U1.R12 | length 1614.8
  Top Layer w10: U1.R12@3266.85,3110.48 3286,3129.63 v1(3286,3130) ; C74.2@3920.26,4163.82 R110.1@3960.26,4163.82 ; R110.1@3961,4164.15 3987.85,4164.15 v1(3988,4164)
  Signal Layer 1 w4: v1(3286,3130) 3419,3130 4130,3841 4130,4022 v1(3988,4164)
P10S6_ECL: C76.1 P10.12 R227.2 | length 120.5
  Top Layer w10: P10.12@3800.79,4106.3 3803.37,4103.71 R227.2@3880.26,4103.71 C76.1@3920.26,4103.71
P10S6_LVCMOS12: C76.2 R114.1 U1.R14 | length 1406.4
  Top Layer w10: U1.R14@3266.85,3189.22 3286,3208.37 v1(3286,3209) ; C76.2@3920.26,4052.53 R114.1@3960.26,4052.53 ; R114.1@3961,4052.15 3987.85,4052.15 v1(3988,4052)
  Signal Layer 1 w4: v1(3286,3209) 3451,3209 4086,3844 4086,3954 v1(3988,4052)
P10S7_ECL: C78.1 P10.14 R233.2 | length 125.2
  Top Layer w10: P10.14@3800.79,4006.3 3814.66,3992.43 R233.2@3880.26,3992.43 C78.1@3920.26,3992.43
P10S7_LVCMOS12: C78.2 R116.1 U1.R15 | length 1215.4
  Top Layer w10: U1.R15@3266.85,3228.59 3267.07,3228.59 v1(3286.48,3248) ; C78.2@3920.26,3941.25 R116.1@3960.26,3941.25 ; R116.1@3961,3941.15 3987.85,3941.15 v1(3988,3941)
  Signal Layer 1 w4: v1(3286.48,3248) 3447,3248 4040,3841 4040,3889 v1(3988,3941)
P10S8_ECL: C80.1 P10.16 R239.2 | length 129.9
  Top Layer w10: P10.16@3800.79,3906.3 3825.94,3881.14 R239.2@3880.26,3881.14 C80.1@3920.26,3881.14
P10S8_LVCMOS12: C80.2 R120.1 U1.P15 | length 1076.7
  Top Layer w10: U1.P15@3227.48,3228.59 3227.59,3228.59 v1(3247,3248) ; C80.2@3920.26,3829.96 R120.1@3960.26,3829.96 ; R120.1@3961,3830.15 3987.4,3830.15 v1(3988,3829.55)
  Signal Layer 1 w4: v1(3247,3248) 3271,3272 3430.45,3272 v1(3988,3829.55)
PGND: J1.52 J1.53 J1.54 J1.55 J1.56 J1.57 J1.58 J1.59 J1.60 J1.61 J1.62 J1.63 pad.0 | length 1220.7
  Top Layer w30: J1.52@4477.36,2736.22 v2(4606.3,2736.22) ; J1.61@4477.36,3956.69 v2(4606.3,3956.69) ; J1.62@4606.3,2622.05 v2(4606.3,2736.22) ; J1.63@4606.3,4070.87 v2(4606.3,3956.69) ; J1.54@4678.11,2854.33 v2(4678.15,2952.91) v2(4678.15,2952.91) J1.55@4678.15,3051.18 ; J1.53@4678.15,2736.22 v2(4606.3,2736.22) ; J1.56@4678.15,3248.03 4678.15,3339.85 v2(4678,3340) 4678.15,3340.15 J1.57@4678.15,3444.88 ; J1.58@4678.15,3641.73 4678.15,3742.85 v2(4678,3743) 4678.15,3743.15 J1.59@4678.15,3838.58 ; J1.60@4678.15,3956.69 v2(4606.3,3956.69)
RESET_LVDS33_N: J1.40 U1.P8 | length 1542.8
  Top Layer w8: U1.P8@3227.48,2953 v1(3246.48,2934) ; v1(4433,3622.05) J1.40@4477.36,3622.05
  Signal Layer 1 w4: v1(3246.48,2934) 3258.48,2946 3346.03,2946 4018.23,3618.2 4429.16,3618.2 v1(4433,3622.05)
RESET_LVDS33_P: J1.39 U1.T8 | length 1498.5
  Top Layer w8: v1(3286.48,2934) 3287.22,2934 U1.T8@3306.22,2953 ; v1(4433,3602.36) J1.39@4477.36,3602.36
  Signal Layer 1 w4: v1(3286.48,2934) 3351,2934 4023.2,3606.2 4429.16,3606.2 v1(4433,3602.36)
TCK_LVCMOS33: J1.35 P11.3 U1.C14 | length 1838.1
  Top Layer w8: v1(4433,3523.62) J1.35@4477.36,3523.62
  Top Layer w10: U1.C14@2794.41,3189.22 2814,3208.81 v1(2814,3209)
  Signal Layer 1 w4: P11.3@4139,3255 4407.62,3523.62 v1(4433,3523.62)
  Signal Layer 2 w4: v1(2814,3209) 2834,3189 4073,3189 P11.3@4139,3255
TDI_LVCMOS33: J1.33 P11.5 U1.C12 | length 1960.6
  Top Layer w4: P11.5@4139,3455 4168.25,3484.25 J1.33@4477.36,3484.25
  Top Layer w10: v1(2774.45,3130) 2774.89,3130 U1.C12@2794.41,3110.48
  Signal Layer 2 w4: v1(2774.45,3130) 2794,3149.55 2794,3291 2958,3455 P11.5@4139,3455
TDO_LVCMOS33: J1.36 P11.4 U1.E14 | length 1790.1
  Top Layer w8: v1(4433,3543.31) J1.36@4477.36,3543.31
  Top Layer w10: U1.E14@2873.15,3189.22 2892,3208.07 v1(2892,3209)
  Signal Layer 1 w4: P11.4@4139,3355 4327.31,3543.31 v1(4433,3543.31)
  Signal Layer 2 w4: v1(2892,3209) 2913,3230 2913,3296 2972,3355 P11.4@4139,3355
TMS_LVCMOS33: J1.34 P11.6 U1.A15 | length 1967.4
  Top Layer w4: P11.6@4139,3555 4190.06,3503.94 J1.34@4477.36,3503.94
  Top Layer w10: v1(2691,3229) 2691.41,3228.59 U1.A15@2715.67,3228.59
  Signal Layer 2 w4: v1(2691,3229) 3017,3555 P11.6@4139,3555
Vbaseline: C112.2 C113.2 J1.17 J1.18 R1.2 R2.2 R4.2 R6.2 R7.2 R8.2 R10.2 R12.2 R13.2 R14.2 R16.2 R18.2 R19.2 R20.2 R22.2 R24.2 R25.2 R26.2 R28.2 R30.2 R31.2 R32.2 R34.2 R36.2 R37.2 R38.2 R40.2 R42.2 R43.2 R44.2 R46.2 R48.2 R49.2 R50.2 R52.2 R54.2 R55.2 R56.2 R58.2 R60.2 R61.2 R62.2 R64.2 R66.2 R67.2 R68.2 R70.2 R72.2 R73.2 R74.2 R76.2 R78.2 R79.2 R80.2 R82.2 R84.2 R85.2 R86.2 R88.2 R90.2 R91.2 R92.2 R94.2 R96.2 R97.2 R98.2 R100.2 R102.2 R103.2 R104.2 R106.2 R108.2 R109.2 R110.2 R112.2 R114.2 R115.2 R116.2 R118.2 R120.2 | length 239.9
  Top Layer w8: v1(4433,3169) 4433.29,3169.29 J1.17@4477.36,3169.29 ; v1(4433,3189) J1.18@4477.36,3188.98
  Top Layer w30: v2(3661,2924) C112.2@3719,2924 C113.2@3812,2924
  other v1: 3963,1361.85 3333,1364.85 2076.93,1365.85 2708.26,1365.85 1449.59,1371.85 3963,1475.85 3333,1476.85 2077,1478.85 2708,1478.85 1449.59,1484.85 3963,1588.85 3333,1589.85 2076.93,1591.85 2708,1591.85 1449.59,1597.85 3333,1701.85 3963,1702.85 2077,1703.85 2708,1704.85 1450,1711.85 3334,1814.85 3963,1815.85 2077,1816.85 2708,1816.85 1449.59,1824.85 3334,1926.85 2076.93,1929.85 2708,1929.85 3963.26,1929.85 1449.59,1938.2 3334,2039.85 2077,2042.85 2708,2042.85 3963.26,2042.85 1450,2050.85 3334,2152.05 2077,2155.85 2708,2155.85 3963.26,2155.85 1449.59,2164.85 3961,3881.33 2071.26,3882.33 1440.26,3887.33 2707,3891.33 3328,3893.33 3961,3992.33 2071.26,3994.33 1440.26,3999.33 2707,4001.33 3327.87,4002.33 3961,4103.33 2071,4106.33 1440.26,4111.33 2707,4112.33 3328,4112.33 3961,4215.33 2071,4218.33 1440.26,4222.33 2707.26,4222.33 3327.87,4222.33 3961,4326.33 2071,4330.33 3327.87,4331.33 2707.26,4333.33 1440.26,4334.33 3961,4438.33 3327.87,4441.33 2071,4442.33 2707.26,4443.33 1440,4446.33 3961,4548.86 3327.87,4550.33 2707.26,4553.33 2071.26,4554.33 1440.26,4558.33 3328,4660.33 3961,4660.33 2707.26,4664.33 2071.26,4666.33 1440.26,4670.33
Vthee: C108.2 C109.2 C111.2 J1.13 J1.14 P12.1 | length 4104.4
  Top Layer w10: v1(4433,3091) 4433.45,3090.55 J1.13@4477.36,3090.55 ; v1(4433,3110) 4433.24,3110.24 J1.14@4477.36,3110.24
  Signal Layer 2 w60: v2(4145,2339) 4145,2852 4384,3091 v1(4433,3091) v1(4433,3110)
  Bottom Layer w60: P12.1@1120.99,2513.78 1295.77,2339 v2(4145,2339)
pads on no net: P12.4 U1.B2 U1.C4 U1.C5 U1.C6 U1.C7 U1.C8 U1.C11 U1.C13 U1.D5 U1.D6 U1.D8 U1.D9 U1.D11 U1.D12 U1.D14 U1.E4 U1.E6 U1.E7 U1.E8 U1.E10 U1.E11 U1.E12 U1.E13 U1.F4 U1.F5 U1.F6 U1.F7 U1.F9 U1.F10 U1.F12 U1.F13 U1.F14 U1.G5 U1.G6 U1.G11 U1.G12 U1.G14 U1.H4 U1.H5 U1.H11 U1.H13 U1.H14 U1.J4 U1.J6 U1.J11 U1.J12 U1.J13 U1.J14 U1.K5 U1.K6 U1.K11 U1.K12 U1.K14 U1.L4 U1.L5 U1.L7 U1.L8 U1.L10 U1.L11 U1.L12 U1.L13 U1.L14 U1.M3 U1.M4 U1.M5 U1.M6 U1.M7 U1.M10 U1.M11 U1.M12 U1.M13 U1.M14 U1.N3 U1.N4 U1.N5 U1.N6 U1.N9 U1.N11 U1.N12 U1.N14 U1.P4 U1.P5 U1.P6 U1.P7 U1.P9 U1.P10 U1.P11 U1.P12 U1.P13 U1.P14 U1.R3 U1.R5 U1.R7 U1.T2 U1.T3 U1.T4 U1.T5 U1.T6 U1.T7 U1.T10
copper on no net: | length 29.1
  Top Layer w10: v1(2735,2697) 2735.26,2697 2755.04,2716.78 ; 2793.56,2834.89 2794.41,2834.89

## Polygon pours and split planes (outlines as drawn)
PGND on Bottom Layer "Bottom Layer-PGND" (solid, pour order 0): 788,1224 789,1225 4551,1225 4551,4710 4540,4699 789,4699 789,4920 790,4919 4724,4919 4724,985 4723,984 788,984
GND on Internal Plane 1 (split plane): 4719.33,989.33 792.48,989.33 792.48,4916.18 4719.33,4916.18
Vbaseline on Internal Plane 2 (split plane): 4719.33,989.33 792.48,989.33 792.48,4916.18 4719.33,4916.18
+3.3V on Internal Plane 3 (split plane): 4719.33,989.33 792.48,989.33 792.48,4916.18 4719.33,4916.18
-5.2V on Internal Plane 4 (split plane): 4719.33,3359.1 2564,3359.1 2560.08,3358.71 2556.31,3357.57 2552.83,3355.71 2549.79,3353.21 2547.29,3350.17 2545.43,3346.69 2544.29,3342.92 2543.9,3339 2543.9,2505 2544.29,2501.08 2545.43,2497.31 2547.29,2493.83 2549.79,2490.79 2552.83,2488.29 2556.31,2486.43 2560.08,2485.29 2564,2484.9 3803,2484.9 3806.92,2485.29 3810.69,2486.43 3814.17,2488.29 3817.21,2490.79 4322.21,2995.79 4324.71,2998.83 4326.57,3002.31 4327.71,3006.08 4328.1,3010 4328.1,3200.9 4719.33,3200.9 4719.33,989.33 792.48,989.33 792.48,4916.18 4719.33,4916.18
+1.2V on Internal Plane 4 (split plane): 4719.33,3241.1 4308,3241.1 4304.08,3240.71 4300.31,3239.57 4296.83,3237.71 4293.79,3235.21 4291.29,3232.17 4289.43,3228.69 4288.29,3224.92 4287.9,3221 4287.9,3018.32 3794.68,2525.1 2584.1,2525.1 2584.1,3318.9 4719.33,3318.9

## Other copper
Internal Plane 4 (plane layer: these items are gaps in the copper):
  lines w40: 4723,3339 2564,3339 2564,2505 3803,2505 4308,3010 4308,3221 4727,3221

## Silkscreen, mask and mechanical layers (free items; w line width, h text height)
Top Overlay:
  lines w30: 787.4,984.25 4724.41,984.25 4724.41,4921.26 787.4,4921.26 787.4,984.25
  text "JUNO RPC FRONT v3" at 1115,4826 h30
  text "jxs 20250615" at 1119,4764 h30
  text "TMS" at 3910,3525 h60
  text "TDI" at 3911,3421 h60
  text "calin" at 1151,3415 h60
  text "TDO" at 3908,3323 h60
  text "TMS" at 3908,3228 h60
  text "GND" at 3908,3120 h60
  text "calout" at 1148,3071 h60
  text "+3.3V" at 3791,3017 h60

## Text inside footprints (layer, text, board x,y; h text height)
J1: Top Overlay "1" at 4416.63,2812.18 h60 r90
P1: Top Overlay "16" at 1261.1,1326.61 h30 r270; Top Overlay "15" at 1161.1,1326.61 h30 r270; Top Overlay "1" at 1161.1,2186.61 h30 r270; Top Overlay "2" at 1261.1,2186.61 h30 r270
P2: Top Overlay "16" at 1891.02,1326.61 h30 r270; Top Overlay "15" at 1791.02,1326.61 h30 r270; Top Overlay "1" at 1791.02,2186.61 h30 r270; Top Overlay "2" at 1891.02,2186.61 h30 r270
P3: Top Overlay "16" at 2520.95,1326.61 h30 r270; Top Overlay "15" at 2420.94,1326.61 h30 r270; Top Overlay "1" at 2420.94,2186.61 h30 r270; Top Overlay "2" at 2520.94,2186.61 h30 r270
P4: Top Overlay "16" at 3150.87,1326.61 h30 r270; Top Overlay "15" at 3050.87,1326.61 h30 r270; Top Overlay "1" at 3050.87,2186.61 h30 r270; Top Overlay "2" at 3150.87,2186.61 h30 r270
P5: Top Overlay "16" at 3780.79,1326.61 h30 r270; Top Overlay "15" at 3680.79,1326.61 h30 r270; Top Overlay "1" at 3680.79,2186.61 h30 r270; Top Overlay "2" at 3780.79,2186.61 h30 r270
P6: Top Overlay "16" at 1261.1,3846.3 h30 r270; Top Overlay "15" at 1161.1,3846.3 h30 r270; Top Overlay "1" at 1164.26,4686.55 h30 r270; Top Overlay "2" at 1265.26,4690.55 h30 r270
P7: Top Overlay "16" at 1891.02,3846.3 h30 r270; Top Overlay "15" at 1791.02,3846.3 h30 r270; Top Overlay "1" at 1791.02,4706.3 h30 r270; Top Overlay "2" at 1891.02,4706.3 h30 r270
P8: Top Overlay "16" at 2520.94,3846.3 h30 r270; Top Overlay "15" at 2420.94,3846.3 h30 r270; Top Overlay "1" at 2420.95,4706.3 h30 r270; Top Overlay "2" at 2520.95,4706.3 h30 r270
P9: Top Overlay "16" at 3150.87,3846.3 h30 r270; Top Overlay "15" at 3050.87,3846.3 h30 r270; Top Overlay "1" at 3050.87,4706.3 h30 r270; Top Overlay "2" at 3150.87,4706.3 h30 r270
P10: Top Overlay "16" at 3780.79,3846.3 h30 r270; Top Overlay "15" at 3680.79,3846.3 h30 r270; Top Overlay "1" at 3680.79,4706.3 h30 r270; Top Overlay "2" at 3780.79,4706.3 h30 r270